# EAGLE board board (EAGLE 9.7.0)
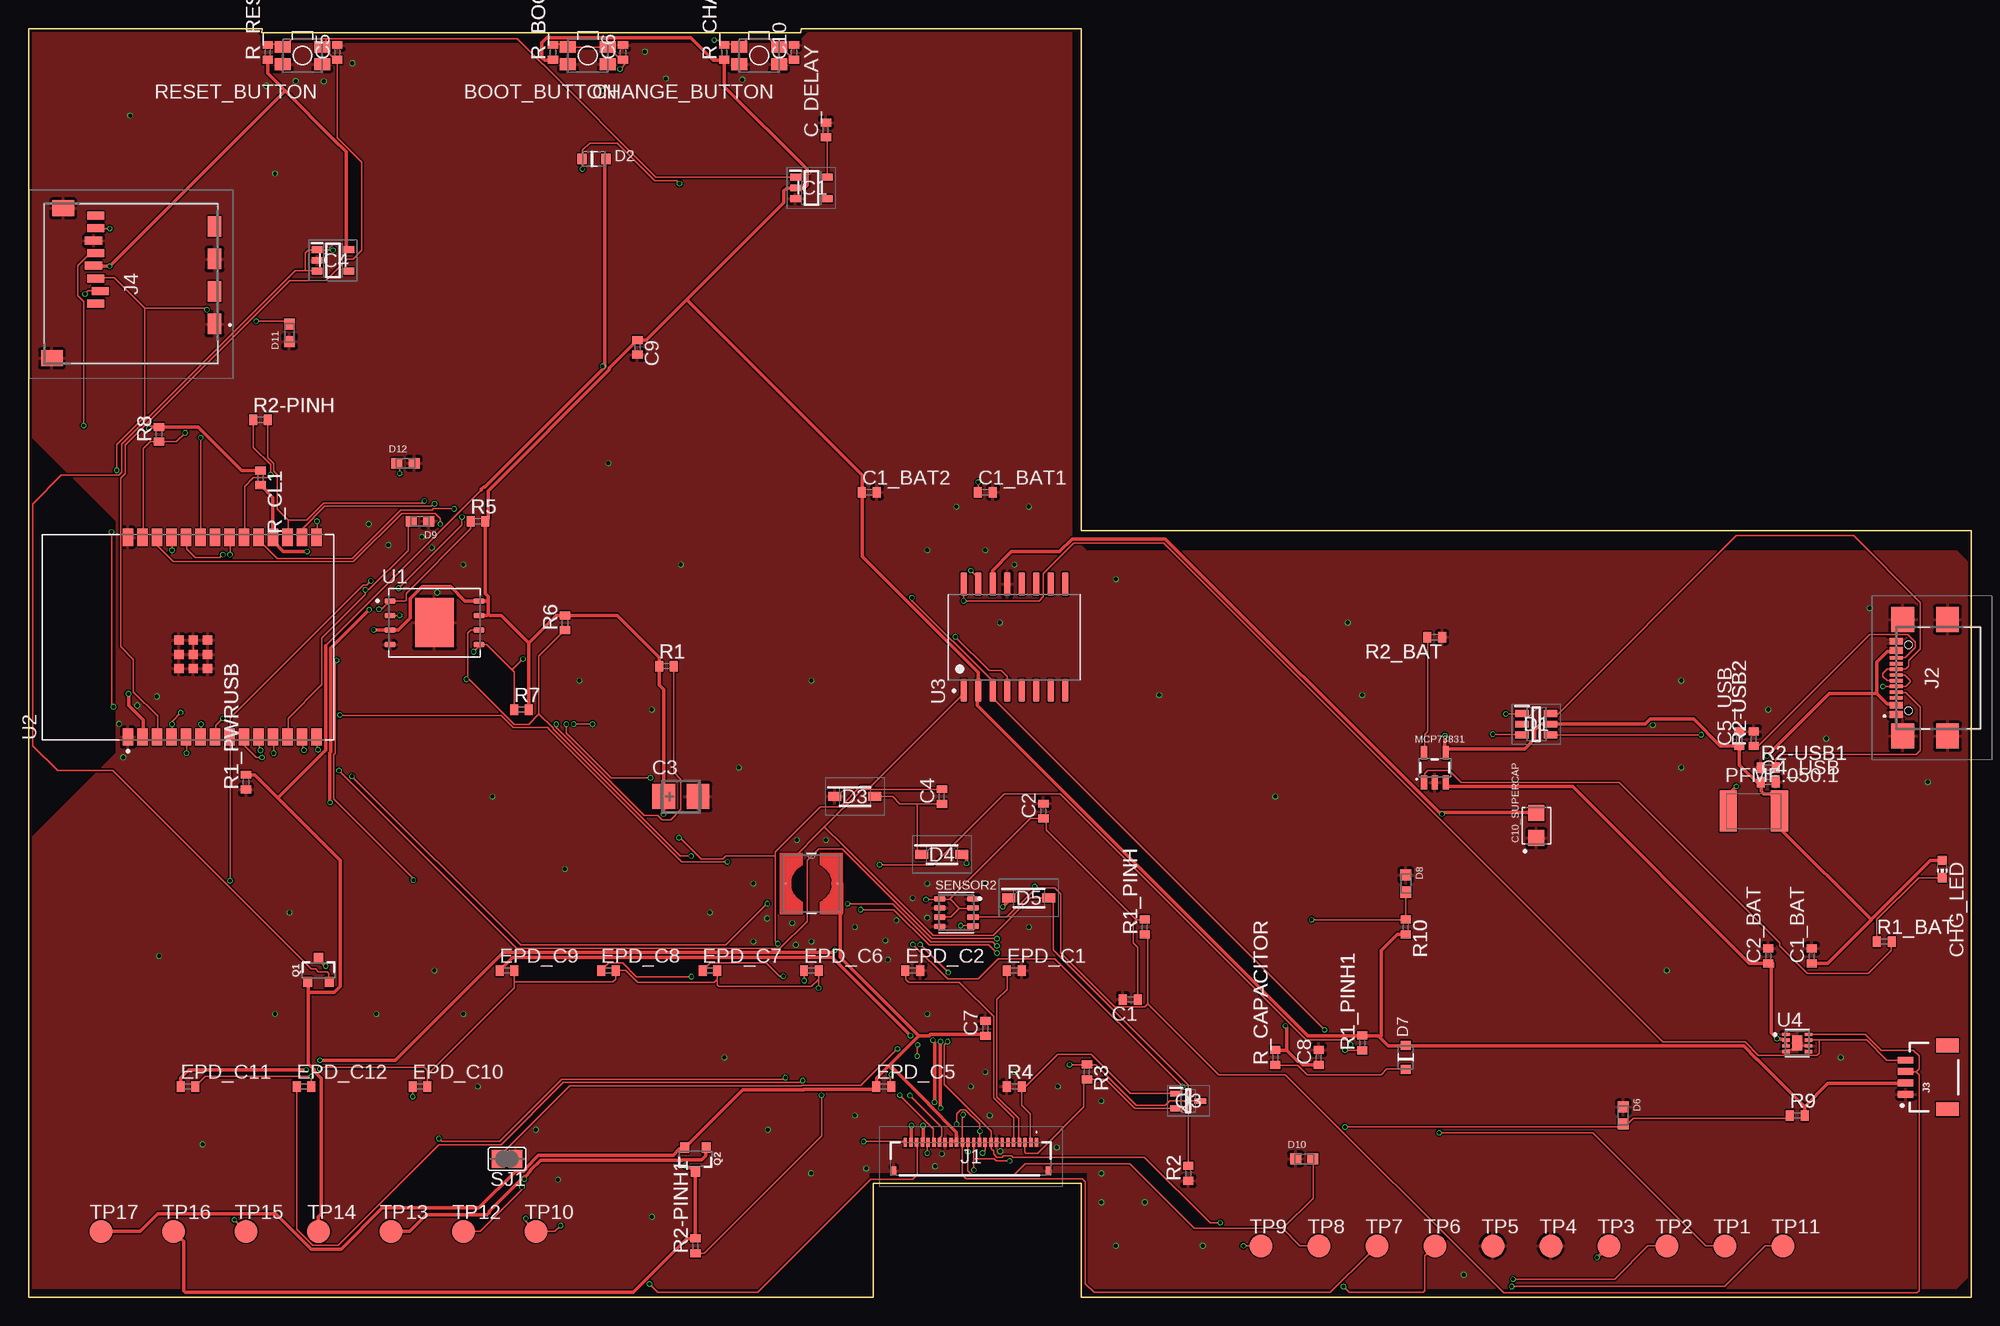
[diagram p0: board, top side]
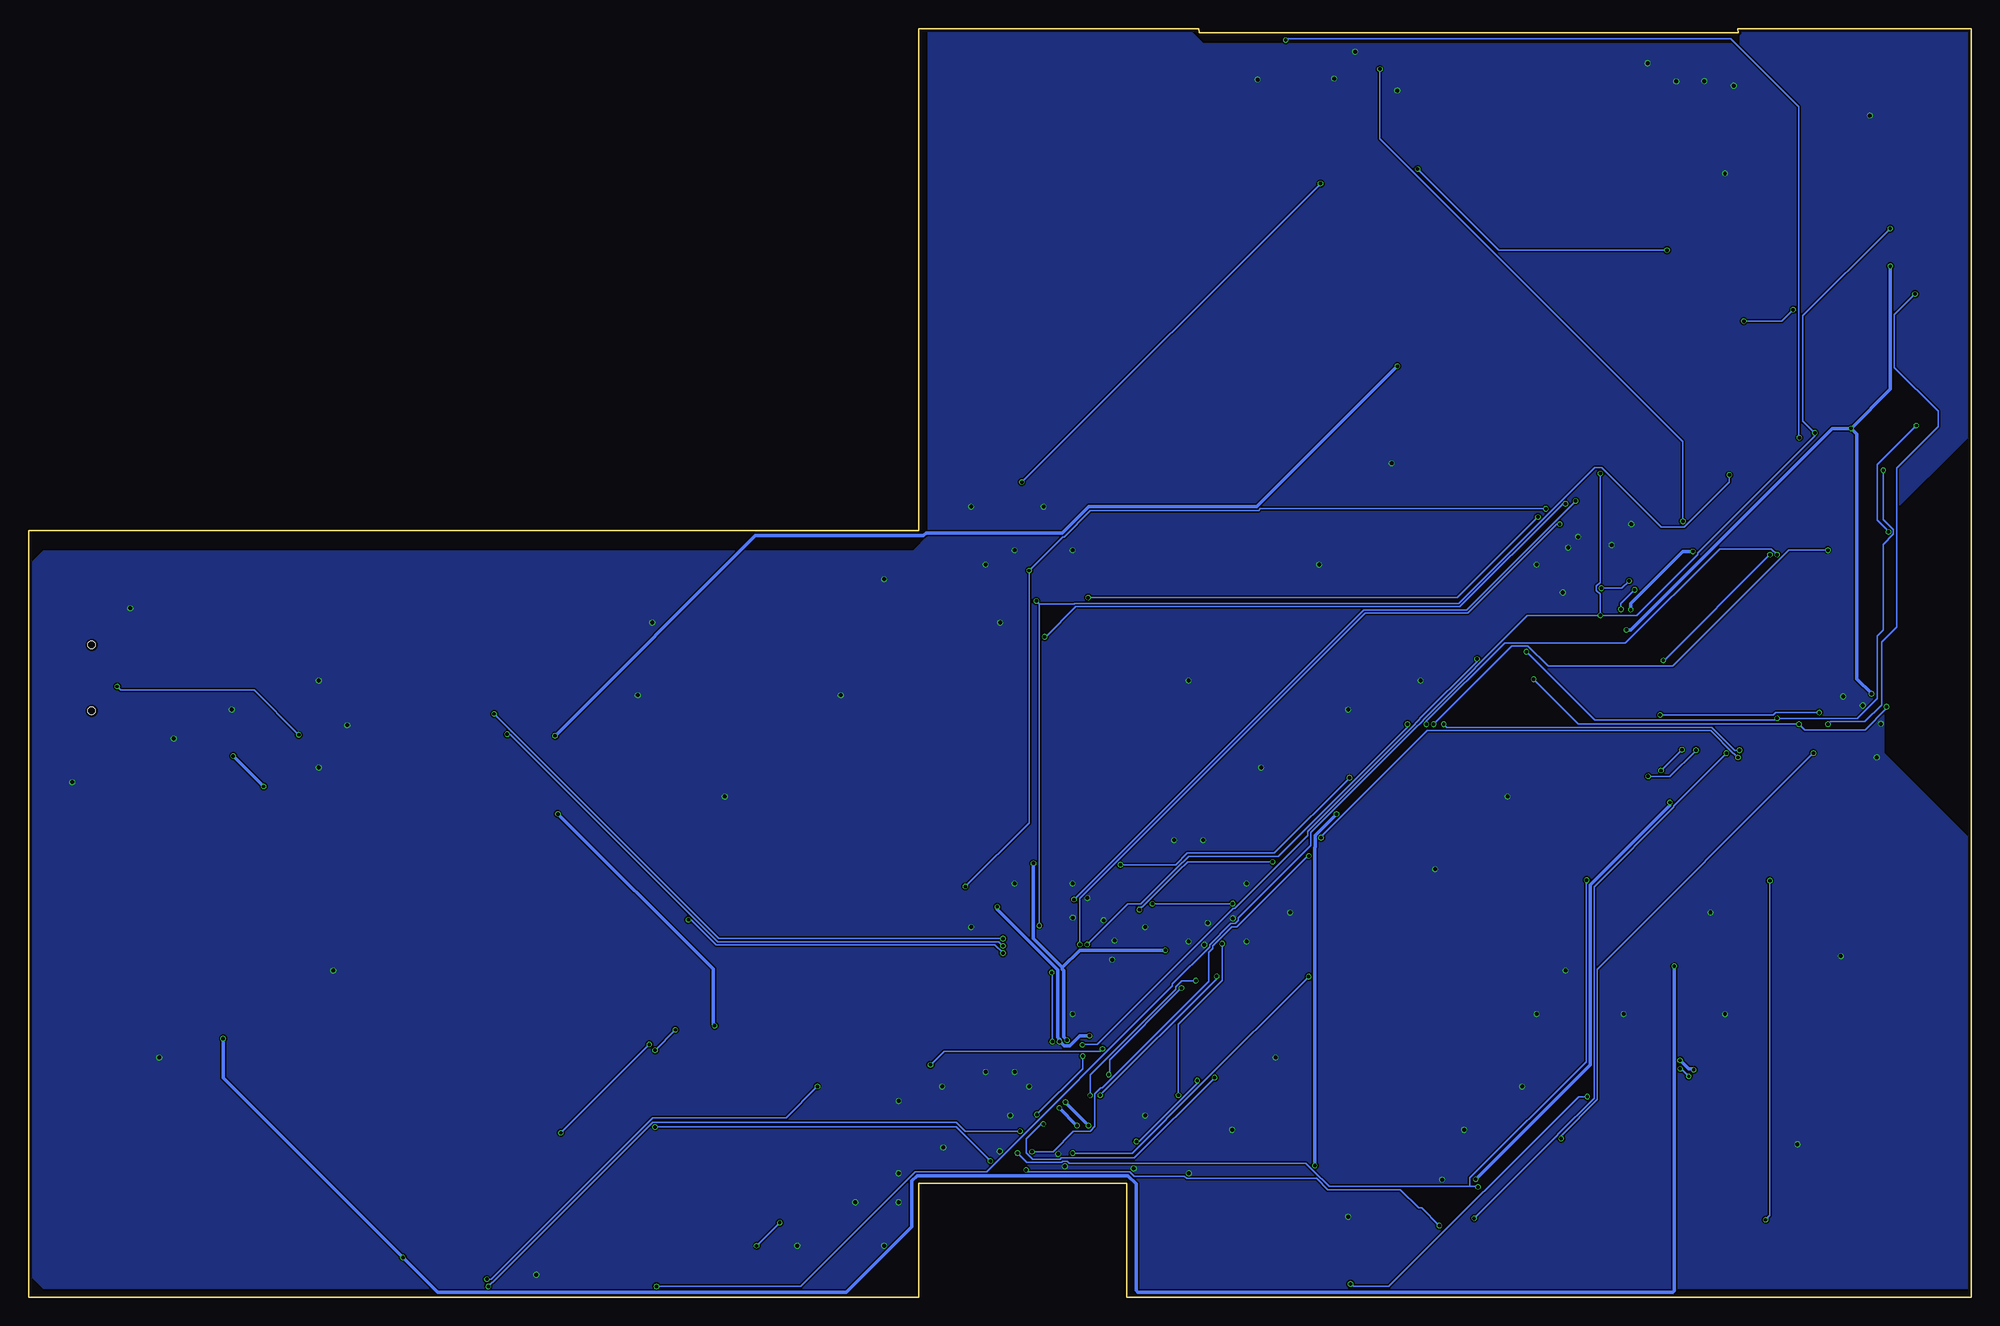
[diagram p1: board, bottom side, seen from below]

Size 170.2 x 111.2 mm. Coordinates in mm from the lower left corner, seen from the top.
Outline: 0,111.2 0,0 74,0 74,10 92.2,10 92.2,0 170.2,0 170.2,67.2 92.2,67.2 92.2,111.2 67.69,111.2 67.66,110.83 20.43,110.83 20.46,111.2 0,111.2
Copper layers (1*16): Top 0.035mm / dielectric 1.6mm / Bottom 0.035mm
Design rules "jlcpcb-2layers *": minimum track width 5mil, minimum drill 0.3mm, track to track 5mil, track to pad 5mil, pad to pad 5mil, via to via 5mil, smd to smd 5mil, copper to edge 0.2mm, drill to drill 6mil, minimum pad ring 10mil, minimum via ring 3mil, stop-mask expansion 4mil, vias tented up to drill 0mil, thermal gap 10mil

## Footprints (pad centres in the part's own frame; a part is rotated, then mirrored left to right if it is on the bottom)
MYBUTTON = smd 1.4 x 1.05: 1 1.75,0.75; 2 -1.75,0.75; 3 -1.75,-0.75; 4 1.75,-0.75
ESP32_WROVER_EAGLE-LTSPICE_C0402 = smd 0.7 x 0.9: 1 -0.65,0; 2 0.65,0
RCL_CT3528 = smd 2 x 2.2: + -1.5,0; - 1.5,0
EAGLE-LTSPICE_C0402 = smd 0.7 x 0.9: 1 -0.65,0; 2 0.65,0
CAPCP3225X100N = smd 1.4 x 1.4: 1 -1.1,0; 2 1.1,0
ADAFRUIT_CHIP-LED0603 = smd 0.8 x 0.8: A 0,-0.75; C 0,0.75
SOT95P280X145-6N = smd 1.2 x 0.6: 1 -1.25,0.95; 2 -1.25,0; 3 -1.25,-0.95; 4 1.25,-0.95; 5 1.25,0; 6 1.25,0.95
ESP32_WROVER_AVX---SD0805S020S1R0_AVX_SD0805S020S1R0_0 = smd 0.8 x 0.9: 1 -1.05,0; 2 1.05,0
SOD3716X135N = smd 1.15 x 0.8: 1 -1.75,0; 2 1.75,0
DIOC1608X36N = smd 0.97 x 0.94: 1 -0.75,0; 2 0.75,0
SOT95P280X125-5N = smd 0.9 x 0.6: 1 -1.4,0.95; 2 -1.4,0; 3 -1.4,-0.95; 4 1.4,-0.95; 5 1.4,0.95
SOT95P280X120-5N = smd 0.9 x 0.6: 1 -1.4,0.95; 2 -1.4,0; 3 -1.4,-0.95; 4 1.4,-0.95; 5 1.4,0.95
FH34SRJ24S05SH99 = smd 0.3 x 0.8: 1 5.75,1.45; 2 5.25,1.45; 3 4.75,1.45; 4 4.25,1.45; 5 3.75,1.45; 6 3.25,1.45; 7 2.75,1.45; 8 2.25,1.45; 9 1.75,1.45; 10 1.25,1.45; 11 0.75,1.45; 12 0.25,1.45; 13 -0.25,1.45; 14 -0.75,1.45; 15 -1.25,1.45; 16 -1.75,1.45; 17 -2.25,1.45; 18 -2.75,1.45; 19 -3.25,1.45; 20 -3.75,1.45; 21 -4.25,1.45; 22 -4.75,1.45; 23 -5.25,1.45; 24 -5.75,1.45 | smd 0.4 x 0.8: MP1 6.75,-1.05; MP2 -6.75,-1.05
SAMACSYS_PARTS_USB4110GFA = smd 0.3 x 1.15: A1 -3.35,3.678; A4 -2.55,3.678; A5 -1.25,3.678; A6 -0.25,3.678; A7 0.25,3.678; A8 1.25,3.678; A9 2.55,3.678; A12 3.35,3.678; B1 3.05,3.678; B4 2.25,3.678; B5 1.75,3.678; B6 0.75,3.678; B7 -0.75,3.678; B8 -1.75,3.678; B9 -2.25,3.678; B12 -3.05,3.678 | smd 2.18 x 2: MP1 -5.11,-0.827; MP2 5.11,-0.827; MP3 -5.11,3.103; MP4 5.11,3.103 | hole 0.65: -2.89,2.603; 2.89,2.603
JST04_1MM_RA = smd 0.6 x 1.35: 1 -1.5,0; 2 -0.5,0; 3 0.5,0; 4 1.5,0 | smd 1.2 x 2: NC1 2.8,-3.675; NC2 -2.8,-3.675
112ATAARR03ATTEND = smd 1.8 x 1.2: G1 10.6,10.4; G2 4.9,10.4; S1 7.75,10.4; S2 2.05,10.4 | smd 1.4 x 1.9: G3 13.6,-3.85; G4 0.45,-2.85 | smd 0.7 x 1.5: P1 8.8,0; P2 7.7,0.4; P3 6.6,0; P4 5.5,-0.2; P5 4.4,0; P6 3.3,-0.2; P7 2.2,0; P8 1.1,0
IND_4828-WE-TPC_WRE = smd 0.127 x 0.127: 1 -2.286,0; 2 2.286,0
ESP32_WROVER_SPARKFUN-IC-POWER_SOT23-5 = smd 0.55 x 1.2: 1 -0.95,-1.3; 2 0,-1.3; 3 0.95,-1.3; 4 0.95,1.3; 5 -0.95,1.3
ESP32C6_VARISTOR_CT/CN1812 = smd 1.5 x 3.6: 1 -2.25,0; 2 2.25,0
ESP32_WROVER_SPARKFUN-DISCRETESEMI_SOT23-3 = smd 0.8 x 0.9: 1 -0.95,-1; 2 0.95,-1; 3 0,1.1
SOT65P210X110-3N = smd 1.05 x 0.5: 1 -1.05,0.65; 2 -1.05,-0.65; 3 1.05,0
ESP32_WROVER_EAGLE-LTSPICE_R0402 = smd 0.7 x 0.9: 1 -0.65,0; 2 0.65,0
ESP32_WROVER_BME680_PSON80P300X300X100-8N = smd 1.016 x 0.5: 1 1.458,1.2; 2 1.458,0.4; 3 1.458,-0.4; 4 1.458,-1.2; 5 -1.458,-1.22; 6 -1.458,-0.4; 7 -1.458,0.4; 8 -1.458,1.2
SJ = smd 1.168 x 1.6: 1 -0.762,0; 2 0.762,0
TP20R = smd 2 x 2: TP 0,0
SON127P600X800X80-9N = smd 0.94 x 0.44: 1 -3.895,1.905; 2 -3.895,0.635; 3 -3.895,-0.635; 4 -3.895,-1.905; 5 3.895,-1.905; 6 3.895,-0.635; 7 3.895,0.635; 8 3.895,1.905 | smd 3.4 x 4.3: 9 0,0
XCVR_ESP32-C6-WROOM-1-N8 = smd 1.5 x 0.9: 1 -8.75,5.26; 2 -8.75,3.99; 3 -8.75,2.72; 4 -8.75,1.45; 5 -8.75,0.18; 6 -8.75,-1.09; 7 -8.75,-2.36; 8 -8.75,-3.63; 9 -8.75,-4.9; 10 -8.75,-6.17; 11 -8.75,-7.44; 12 -8.75,-8.71; 13 -8.75,-9.98; 14 -8.75,-11.25; 15 8.75,-11.25; 16 8.75,-9.98; 17 8.75,-8.71; 18 8.75,-7.44; 19 8.75,-6.17; 20 8.75,-4.9; 21 8.75,-3.63; 22 8.75,-2.36; 23 8.75,-1.09; 24 8.75,0.18; 25 8.75,1.45; 26 8.75,2.72; 27 8.75,3.99; 28 8.75,5.26 | smd 0.8 x 0.8: 29_1 -2.755,0.79; 29_2 -1.505,0.79; 29_3 -0.255,0.79; 29_4 -2.755,-0.46; 29_5 -1.505,-0.46; 29_6 -0.255,-0.46; 29_7 -2.755,-1.71; 29_8 -1.505,-1.71; 29_9 -0.255,-1.71
SOIC127P1032X265-16N = smd 2.05 x 0.59: 1 -4.655,4.445; 2 -4.655,3.175; 3 -4.655,1.905; 4 -4.655,0.635; 5 -4.655,-0.635; 6 -4.655,-1.905; 7 -4.655,-3.175; 8 -4.655,-4.445; 9 4.655,-4.445; 10 4.655,-3.175; 11 4.655,-1.905; 12 4.655,-0.635; 13 4.655,0.635; 14 4.655,1.905; 15 4.655,3.175; 16 4.655,4.445
SON50P200X200X80-9N = smd 0.76 x 0.27: 1 -0.985,0.75; 2 -0.985,0.25; 3 -0.985,-0.25; 4 -0.985,-0.75; 5 0.985,-0.75; 6 0.985,-0.25; 7 0.985,0.25; 8 0.985,0.75 | smd 0.9 x 1.3: 9 0,0

## Placement (x,y rotation side)
BOOT_BUTTON  BUTTON_CUSYOMV1  [MYBUTTON]  49,108.83 180 top
C1  100nF  [ESP32_WROVER_EAGLE-LTSPICE_C0402]  96.52,26.11 180 top
C1_BAT  4.7uF  [ESP32_WROVER_EAGLE-LTSPICE_C0402]  156.21,29.92 90 top
C1_BAT1  4.7uF  [ESP32_WROVER_EAGLE-LTSPICE_C0402]  83.82,70.56 0 top
C1_BAT2  4.7uF  [ESP32_WROVER_EAGLE-LTSPICE_C0402]  73.66,70.56 0 top
C2  100nF  [ESP32_WROVER_EAGLE-LTSPICE_C0402]  88.9,42.62 90 top
C2_BAT  4.7uF  [ESP32_WROVER_EAGLE-LTSPICE_C0402]  152.4,29.92 90 top
C3  100uF TANT  [RCL_CT3528]  57.15,43.89 0 top
C4  4.7uF/25V  [EAGLE-LTSPICE_C0402]  80.01,43.89 90 top
C4_USB  100nF  [EAGLE-LTSPICE_C0402]  152.4,45.16 0 top
C5  1uF  [ESP32_WROVER_EAGLE-LTSPICE_C0402]  27.05,109.11 90 top
C5_USB  4.7uF  [EAGLE-LTSPICE_C0402]  149.86,48.97 90 top
C6  100nF  [ESP32_WROVER_EAGLE-LTSPICE_C0402]  52.07,109.11 90 top
C7  10uF  [ESP32_WROVER_EAGLE-LTSPICE_C0402]  83.82,23.57 90 top
C8  100nF  [ESP32_WROVER_EAGLE-LTSPICE_C0402]  113.03,21.03 90 top
C9  100nF  [ESP32_WROVER_EAGLE-LTSPICE_C0402]  53.34,83.26 270 top
C10  100nF  [ESP32_WROVER_EAGLE-LTSPICE_C0402]  67.05,109.11 90 top
C10_SUPERCAP  CPH3225A  [CAPCP3225X100N]  132.08,41.35 90 top
C_DELAY  100nF  [ESP32_WROVER_EAGLE-LTSPICE_C0402]  69.85,102.31 90 top
CHANGE_BUTTON  BUTTON_CUSYOMV1  [MYBUTTON]  64,108.83 180 top
CHG_LED  [ADAFRUIT_CHIP-LED0603]  167.64,37.54 180 top
D1  USBLC6-2SC6Y  [SOT95P280X145-6N]  132.08,50.24 0 top
D2  ESP32_WROVER_AVX---SD0805S020S1R0_AVX_SD0805S020S1R0_0_0AVX_SD0805S020S1R0_0_0  [ESP32_WROVER_AVX---SD0805S020S1R0_AVX_SD0805S020S1R0_0]  49.53,99.77 0 top
D3  MBR0530  [SOD3716X135N]  72.39,43.89 0 top
D4  MBR0530  [SOD3716X135N]  80.01,38.81 0 top
D5  MBR0530  [SOD3716X135N]  87.63,35 0 top
D6  PGB1010603MR  [DIOC1608X36N]  139.7,15.95 270 top
D7  ESP32_WROVER_AVX---SD0805S020S1R0_AVX_SD0805S020S1R0_0_0AVX_SD0805S020S1R0_0_0  [ESP32_WROVER_AVX---SD0805S020S1R0_AVX_SD0805S020S1R0_0]  120.65,21.03 90 top
D8  PGB1010603MR  [DIOC1608X36N]  120.65,36.27 270 top
D9  PGB1010603MR  [DIOC1608X36N]  34.29,68.02 180 top
D10  PGB1010603MR  [DIOC1608X36N]  111.76,12.14 0 top
D11  PGB1010603MR  [DIOC1608X36N]  22.86,84.53 90 top
D12  PGB1010603MR  [DIOC1608X36N]  33.02,73.1 0 top
EPD_C1  1uF/50V  [ESP32_WROVER_EAGLE-LTSPICE_C0402]  86.36,28.65 0 top
EPD_C2  1uF/50V  [ESP32_WROVER_EAGLE-LTSPICE_C0402]  77.47,28.65 0 top
EPD_C5  0.1uF/50V  [ESP32_WROVER_EAGLE-LTSPICE_C0402]  74.93,18.49 0 top
EPD_C6  1uF/50V  [ESP32_WROVER_EAGLE-LTSPICE_C0402]  68.58,28.65 0 top
EPD_C7  1uF/50V  [ESP32_WROVER_EAGLE-LTSPICE_C0402]  59.69,28.65 0 top
EPD_C8  1uF/50V  [ESP32_WROVER_EAGLE-LTSPICE_C0402]  50.8,28.65 0 top
EPD_C9  1uF/50V  [ESP32_WROVER_EAGLE-LTSPICE_C0402]  41.91,28.65 0 top
EPD_C10  1uF/50V  [ESP32_WROVER_EAGLE-LTSPICE_C0402]  34.29,18.49 0 top
EPD_C11  1uF/50V  [ESP32_WROVER_EAGLE-LTSPICE_C0402]  13.97,18.49 0 top
EPD_C12  1uF/50V  [ESP32_WROVER_EAGLE-LTSPICE_C0402]  24.13,18.49 0 top
IC1  BD5229G-TR  [SOT95P280X125-5N]  68.58,97.23 0 top
IC4  XC6220A331MR-G  [SOT95P280X120-5N]  26.67,90.88 0 top
J1  FH34SRJ-24S-0.5SH_99_  [FH34SRJ24S05SH99]  82.55,12.14 0 top
J2  SAMACSYS_PARTS_USB4110-GF-A  [SAMACSYS_PARTS_USB4110GFA]  167.28,54.3 90 top
J3  QWIIC_RIGHT_ANGLE  [JST04_1MM_RA]  164.43,19.3 90 top
J4  112A-TAAR-R03_ATTEND  [112ATAARR03ATTEND]  5.89,95.9 270 top
L1  68uH  [IND_4828-WE-TPC_WRE]  68.58,36.27 0 top
MCP73831  ESP32_WROVER_SPARKFUN-IC-POWER_MCP73831  [ESP32_WROVER_SPARKFUN-IC-POWER_SOT23-5]  123.19,46.43 0 top
PFMF.050.1  ESP32C6_VARISTORCN1812  [ESP32C6_VARISTOR_CT/CN1812]  151.13,42.62 0 top
Q1  20V/4.2A/52mΩ/1.4W  [ESP32_WROVER_SPARKFUN-DISCRETESEMI_SOT23-3]  25.4,28.65 0 top
Q2  20V/4.2A/52mΩ/1.4W  [ESP32_WROVER_SPARKFUN-DISCRETESEMI_SOT23-3]  58.42,12.14 180 top
Q3  SI1308EDL-T1-GE3  [SOT65P210X110-3N]  101.6,17.22 0 top
R1  10K  [ESP32_WROVER_EAGLE-LTSPICE_R0402]  55.88,55.32 0 top
R1_BAT  200  [ESP32_WROVER_EAGLE-LTSPICE_R0402]  162.56,31.19 0 top
R1_PINH  10K  [ESP32_WROVER_EAGLE-LTSPICE_R0402]  97.79,32.46 90 top
R1_PINH1  10K  [ESP32_WROVER_EAGLE-LTSPICE_R0402]  116.84,22.3 90 top
R1_PWRUSB  100K  [ESP32_WROVER_EAGLE-LTSPICE_R0402]  19.05,45.16 90 top
R2  2.2  [ESP32_WROVER_EAGLE-LTSPICE_R0402]  101.6,10.87 90 top
R2-PINH  10K  [ESP32_WROVER_EAGLE-LTSPICE_R0402]  20.32,76.91 0 top
R2-PINH1  10K  [ESP32_WROVER_EAGLE-LTSPICE_R0402]  58.42,4.52 90 top
R2-USB1  5k1  [ESP32_WROVER_EAGLE-LTSPICE_R0402]  152.4,46.43 0 top
R2-USB2  5k1  [ESP32_WROVER_EAGLE-LTSPICE_R0402]  151.13,48.97 90 top
R2_BAT  2K  [ESP32_WROVER_EAGLE-LTSPICE_R0402]  123.19,57.86 180 top
R3  0.47  [ESP32_WROVER_EAGLE-LTSPICE_R0402]  92.71,19.76 270 top
R4  10K  [ESP32_WROVER_EAGLE-LTSPICE_R0402]  86.36,18.49 0 top
R5  10K  [ESP32_WROVER_EAGLE-LTSPICE_R0402]  39.37,68.02 0 top
R6  10K  [ESP32_WROVER_EAGLE-LTSPICE_R0402]  46.99,59.13 90 top
R7  10K  [ESP32_WROVER_EAGLE-LTSPICE_R0402]  43.18,51.51 0 top
R8  10K  [ESP32_WROVER_EAGLE-LTSPICE_R0402]  11.43,75.64 90 top
R9  10K  [ESP32_WROVER_EAGLE-LTSPICE_R0402]  154.94,15.95 0 top
R10  10K  [ESP32_WROVER_EAGLE-LTSPICE_R0402]  120.65,32.46 270 top
R_BOOT  10K  [ESP32_WROVER_EAGLE-LTSPICE_R0402]  45.95,109.11 90 top
R_CAPACITOR  15  [ESP32_WROVER_EAGLE-LTSPICE_R0402]  109.22,21.03 90 top
R_CHANGE  10K  [ESP32_WROVER_EAGLE-LTSPICE_R0402]  60.95,109.11 90 top
R_CL1  10K  [ESP32_WROVER_EAGLE-LTSPICE_R0402]  20.32,71.83 270 top
R_RESET  10K  [ESP32_WROVER_EAGLE-LTSPICE_R0402]  20.95,109.11 90 top
RESET_BUTTON  BUTTON_CUSYOMV1  [MYBUTTON]  24,108.83 180 top
SENSOR2  BME688  [ESP32_WROVER_BME680_PSON80P300X300X100-8N]  81.28,33.73 0 top
SJ1  [SJ]  41.91,12.14 180 top
TP1  TPTP20R  [TP20R]  148.59,4.52 0 top
TP2  TPTP20R  [TP20R]  143.51,4.52 0 top
TP3  TPTP20R  [TP20R]  138.43,4.52 0 top
TP4  TPTP20R  [TP20R]  133.35,4.52 0 top
TP5  TPTP20R  [TP20R]  128.27,4.52 0 top
TP6  TPTP20R  [TP20R]  123.19,4.52 0 top
TP7  TPTP20R  [TP20R]  118.11,4.52 0 top
TP8  TPTP20R  [TP20R]  113.03,4.52 0 top
TP9  TPTP20R  [TP20R]  107.95,4.52 0 top
TP10  TPTP20R  [TP20R]  44.45,5.79 0 top
TP11  TPTP20R  [TP20R]  153.67,4.52 0 top
TP12  TPTP20R  [TP20R]  38.1,5.79 0 top
TP13  TPTP20R  [TP20R]  31.75,5.79 0 top
TP14  TPTP20R  [TP20R]  25.4,5.79 0 top
TP15  TPTP20R  [TP20R]  19.05,5.79 0 top
TP16  TPTP20R  [TP20R]  12.7,5.79 0 top
TP17  TPTP20R  [TP20R]  6.35,5.79 0 top
U1  W25Q512JVEIQ  [SON127P600X800X80-9N]  35.56,59.13 0 top
U2  ESP32-C6-WROOM-1-N8  [XCVR_ESP32-C6-WROOM-1-N8]  13.97,57.86 90 top
U3  DS3231SN#  [SOIC127P1032X265-16N]  86.36,57.86 90 top
U4  MAX17048G+T10  [SON50P200X200X80-9N]  154.94,22.3 0 top

## Library data of the parts
BOOT_BUTTON CHANGE_BUTTON CHG_LED PFMF.050.1 RESET_BUTTON SJ1 TP1-TP17 = DeskAssistant v19 v1
C1 C1_BAT C1_BAT1 C1_BAT2 C2 C2_BAT C4 C4_USB C5 C5_USB C6-C10 C_DELAY EPD_C1 EPD_C2 EPD_C5-EPD_C12 = DeskAssistant v19 v1; SPICEMODEL: NONE; SPICEPREFIX: C
C3 = DeskAssistant v19 v1; SPICEPREFIX: C
C10_SUPERCAP = DeskAssistant v19 v1; AVAILABILITY: Not in stock; CHECK_PRICES: https://www.snapeda.com/parts/CPH3225A/Seiko+Instruments/view-part/?ref=eda; DESCRIPTION: 11 mF (EDLC) Supercapacitor 3.3 V 1210 (3225 Metric) - -; MF: Seiko Instruments; MP: CPH3225A; PACKAGE: 1210 Seiko; PRICE: None; PURCHASE-URL: https://www.snapeda.com/api/url_track_click_mouser/?unipart_id=562593&manufacturer=Seiko Instruments&part_name=CPH3225A&search_term=None; SNAPEDA_LINK: https://www.snapeda.com/parts/CPH3225A/Seiko+Instruments/view-part/?ref=snap
D1 = DeskAssistant v19 v1; AVAILABILITY: In Stock; CHECK_PRICES: https://www.snapeda.com/parts/USBLC6-2SC6Y/STMicroelectronics/view-part/?ref=eda; DESCRIPTION: 17V Clamp 5A (8/20µs) Ipp Tvs Diode Surface Mount SOT-23-6; MF: STMicroelectronics; MP: USBLC6-2SC6Y; PACKAGE: SOT-23-6 STMicroelectronics; PRICE: None; SNAPEDA_LINK: https://www.snapeda.com/parts/USBLC6-2SC6Y/STMicroelectronics/view-part/?ref=snap
D2 D7 = DeskAssistant v19 v1; CENTROID_NOT_SPECIFIED: No; DATASHEET: http://datasheets.avx.com/schottky.pdf; DIGIKEY_DESCRIPTION: DIODE SCHOTTKY 20V 1A 0805; DIGIKEY_PART_NUMBER: 478-7800-1-ND; LEAD_FREE: yes; MF: AVX; MOUSER_PART_NUMBER: 581-SD0805S020S1R0; PACKAGE: 0805 (2012 metric); PREFIX: D; ROHS: yes; TEMPERATURE_RANGE_HIGH: +125°C; TEMPERATURE_RANGE_LOW: -55°C
D3-D5 = DeskAssistant v19 v1; AVAILABILITY: In Stock; CHECK_PRICES: https://www.snapeda.com/parts/MBR0530/Onsemi/view-part/?ref=eda; DESCRIPTION: Diode Schottky 30 V 500mA Surface Mount SOD-123; MF: ON Semiconductor; MP: MBR0530; PACKAGE: SOD-123-2 ON Semiconductor; PRICE: None; PURCHASE-URL: https://www.snapeda.com/api/url_track_click_mouser/?unipart_id=179458&manufacturer=ON Semiconductor&part_name=MBR0530&search_term=None; SNAPEDA_LINK: https://www.snapeda.com/parts/MBR0530/Onsemi/view-part/?ref=snap
D6 D8-D12 = DeskAssistant v19 v1; AVAILABILITY: In Stock; CHECK_PRICES: https://www.snapeda.com/parts/PGB1010603MR/Littelfuse/view-part/?ref=eda; DESCRIPTION: 150V (Typ) Clamp - Ipp Tvs Diode Surface Mount 0603 (1608 Metric); MF: Littelfuse Inc.; MP: PGB1010603MR; PACKAGE: 0603 Littelfuse Inc.; PRICE: None; PURCHASE-URL: https://www.snapeda.com/api/url_track_click_mouser/?unipart_id=5659453&manufacturer=Littelfuse Inc.&part_name=PGB1010603MR&search_term=None; SNAPEDA_LINK: https://www.snapeda.com/parts/PGB1010603MR/Littelfuse/view-part/?ref=snap
IC1 = DeskAssistant v19 v1; DESCRIPTION: Voltage Detector with Adjustable Delay Time: CMOS processes are utilized to develop high precision, low current consumption CMOS reset ICs that allow arbitrary setting of the delay time. The extensive lineup includes both Nch Open Drain and CMOS output types in a wide range of detection voltages (from 2.3V to 6.0V, in 0.1V steps), enabling selection of the ideal solution based on customer requirements. In addition, the entire series is of course both lead-free and RoHS-compliant.; HEIGHT: 1.25mm; MANUFACTURER_NAME: ROHM Semiconductor; MANUFACTURER_PART_NUMBER: BD5229G-TR; MOUSER_PART_NUMBER: 755-BD5229G-TR; MOUSER_PRICE-STOCK: https://www.mouser.co.uk/ProductDetail/ROHM-Semiconductor/BD5229G-TR?qs=4kLU8WoGk0vvnhrrYwdszw%3D%3D
IC4 = DeskAssistant v19 v1; DESCRIPTION: LDO Voltage Regulators; HEIGHT: 1.2mm; MANUFACTURER_NAME: Torex; MANUFACTURER_PART_NUMBER: XC6220A331MR-G; MOUSER_PART_NUMBER: 865-XC6220A331MR-G; MOUSER_PRICE-STOCK: https://www.mouser.co.uk/ProductDetail/Torex-Semiconductor/XC6220A331MR-G?qs=AsjdqWjXhJ8ZSWznL1J0gg%3D%3D
J1 = DeskAssistant v19 v1; DESCRIPTION: 24 Position FFC, FPC Connector Contacts, Top and Bottom 0.020" (0.50mm) Surface Mount, Right Angle; HEIGHT: 1.1mm; MANUFACTURER_NAME: Hirose; MANUFACTURER_PART_NUMBER: FH34SRJ-24S-0.5SH(99); MOUSER_PART_NUMBER: 798-FH34SRJ24S05SH99; MOUSER_PRICE-STOCK: https://www.mouser.co.uk/ProductDetail/Hirose-Connector/FH34SRJ-24S-0.5SH99?qs=vcbW%252B4%252BSTIpKBl5ap9J8Fw%3D%3D
J2 = DeskAssistant v19 v1; DESCRIPTION: CONN USB 2.0 TYPE-C R/A SMT; HEIGHT: 3.26mm; MANUFACTURER_NAME: GCT (GLOBAL CONNECTOR TECHNOLOGY); MANUFACTURER_PART_NUMBER: USB4110-GF-A; MOUSER_PART_NUMBER: 640-USB4110-GF-A; MOUSER_PRICE-STOCK: https://www.mouser.co.uk/ProductDetail/GCT/USB4110-GF-A?qs=KUoIvG%2F9IlYiZvIXQjyJeA%3D%3D
J3 = DeskAssistant v19 v1; PROD_ID: CONN-13694
J4 = DeskAssistant v19 v1; DESCRIPTION: Micro SD Card Socket, Push-Push Type, Top Mount, SMT, H=1.83mm, 10u; HEIGHT: 1.9mm; MANUFACTURER_NAME: ATTEND; MANUFACTURER_PART_NUMBER: 112A-TAAR-R03 ATTEND
L1 = DeskAssistant v19 v1; COPYRIGHT: Copyright (C) 2024 Ultra Librarian. All rights reserved.; MANUFACTURER_PART_NUMBER: 744043680; MFR_NAME: Wurth Electronics
MCP73831 = DeskAssistant v19 v1; PROD_ID: IC-09995
Q1 Q2 = DeskAssistant v19 v1; PROD_ID: TRAN-14388
Q3 = DeskAssistant v19 v1; AVAILABILITY: In Stock; CHECK_PRICES: https://www.snapeda.com/parts/SI1308EDL-T1-GE3/Vishay+Siliconix/view-part/?ref=eda; DESCRIPTION: Si1308EDL-T1-GE3 N-channel MOSFET Transistor, 1.5 A, 30 V, 3-Pin SC-70 | Siliconix / Vishay SI1308EDL-T1-GE3; MF: Vishay Siliconix; MP: SI1308EDL-T1-GE3; PACKAGE: SOT-323 Vishay Semiconductor; PRICE: None; PURCHASE-URL: https://www.snapeda.com/api/url_track_click_mouser/?unipart_id=274603&manufacturer=Vishay Siliconix&part_name=SI1308EDL-T1-GE3&search_term=None; SNAPEDA_LINK: https://www.snapeda.com/parts/SI1308EDL-T1-GE3/Vishay+Siliconix/view-part/?ref=snap
R1 R1_BAT R1_PINH R1_PINH1 R1_PWRUSB R2 R2-PINH R2-PINH1 R2-USB1 R2-USB2 R2_BAT R3-R10 R_BOOT R_CAPACITOR R_CHANGE R_CL1 R_RESET = DeskAssistant v19 v1; SPICEMODEL: NONE; SPICEPREFIX: R
SENSOR2 = DeskAssistant v19 v1; AVAILABILITY: Unavailable; DESCRIPTION: Integrated Environmental Unit; MF: Bosch Sensortec; MP: BME680; PACKAGE: LGA-8 Bosch Tools; PRICE: None
U1 = DeskAssistant v19 v1; AVAILABILITY: In Stock; CHECK_PRICES: https://www.snapeda.com/parts/W25Q512JVEIQ/Winbond+Electronics/view-part/?ref=eda; DESCRIPTION: FLASH - NOR Memory IC 512Mb (64M x 8) SPI - Quad I/O 133 MHz 8-WSON (8x6); MF: Winbond Electronics; MP: W25Q512JVEIQ; PACKAGE: Package; PRICE: None; SNAPEDA_LINK: https://www.snapeda.com/parts/W25Q512JVEIQ/Winbond+Electronics/view-part/?ref=snap
U2 = DeskAssistant v19 v1; AVAILABILITY: In Stock; CHECK_PRICES: https://www.snapeda.com/parts/ESP32-C6-WROOM-1-N8/Espressif+Systems/view-part/?ref=eda; DESCRIPTION: Multiprotocol Modules ESP32-C6 module, Wi-Fi 6 in 2.4 GHz band, Bluetooth 5, Zigbee 3.0 and Thread. ESP34-WROOM Compatible - ENGINEERING SAMPLE; MF: Espressif Systems; MP: ESP32-C6-WROOM-1-N8; PACKAGE: None; PRICE: None; SNAPEDA_LINK: https://www.snapeda.com/parts/ESP32-C6-WROOM-1-N8/Espressif+Systems/view-part/?ref=snap
U3 = DeskAssistant v19 v1; AVAILABILITY: In Stock; CHECK_PRICES: https://www.snapeda.com/parts/DS3231SN%23/Analog+Devices/view-part/?ref=eda; DESCRIPTION: Extremely Accurate I²C-Integrated RTC/TCXO/Crystal; MF: Analog Devices; MP: DS3231SN#; PACKAGE: SOIC-16 Maxim; PRICE: None; PURCHASE-URL: https://www.snapeda.com/api/url_track_click_mouser/?unipart_id=99048&manufacturer=Analog Devices&part_name=DS3231SN#&search_term=None; SNAPEDA_LINK: https://www.snapeda.com/parts/DS3231SN%23/Analog+Devices/view-part/?ref=snap
U4 = DeskAssistant v19 v1; AVAILABILITY: In Stock; CHECK_PRICES: https://www.snapeda.com/parts/MAX17048G+T10/Analog+Devices/view-part/?ref=eda; DESCRIPTION: 3µA 1-Cell/2-Cell Fuel Gauge with ModelGauge; MF: Analog Devices; MP: MAX17048G+T10; PACKAGE: TDFN-8 Maxim; PRICE: None; PURCHASE-URL: https://www.snapeda.com/api/url_track_click_mouser/?unipart_id=329239&manufacturer=Analog Devices&part_name=MAX17048G+T10&search_term=None; SNAPEDA_LINK: https://www.snapeda.com/parts/MAX17048G+T10/Analog+Devices/view-part/?ref=snap

## Nets
3V3: C1_BAT2.1 C3.+ C9.1 D7.2 IC1.2 IC4.5 J3.2 J4.P4 Q2.3 R1.1 R1_PINH1.2 R2-PINH1.2 R5.2 R6.2 R7.2 R8.2 R9.2 R10.2 R_BOOT.1 R_CHANGE.1 R_CL1.1 R_RESET.1 TP16.TP U1.3 U1.7 U1.8 U2.2 U3.2
32KHZ: R2-PINH1.1 U2.9 U3.1
DN: D1.4 J2.A7 J2.B7
DP: D1.6 J2.A6 J2.B6
EPD_3V3: C7.1 EPD_C5.1 J1.15 J1.16 L1.2 Q2.2 TP17.TP
EPD_3V3_C: Q2.1 R_CL1.2 TP13.TP U2.18
EPD_BUSY: J1.9 TP9.TP U2.26
EPD_CS: D6.2 J1.12 R9.1 TP10.TP U2.11
EPD_DC: J1.11 TP11.TP U2.5
EPD_RST: J1.10 TP12.TP U2.21
FLASH_CS: D9.2 R5.1 U1.1 U2.12
GDR: J1.2 Q3.1 R4.2
GND: BOOT_BUTTON.1 BOOT_BUTTON.2 C1.2 C1_BAT1.2 C1_BAT2.2 C1_BAT.2 C2.2 C2_BAT.2 C3.- C4_USB.2 C5.2 C5_USB.2 C6.2 C7.2 C8.2 C9.2 C10.2 C10_SUPERCAP.1 C_DELAY.2 CHANGE_BUTTON.1 CHANGE_BUTTON.2 D3.1 D6.1 D8.1 D9.1 D10.1 D11.1 D12.2 EPD_C1.2 EPD_C2.2 IC1.3 IC4.2 J1.8 J1.17 J1.MP1 J1.MP2 J2.A1 J2.A12 J2.B1 J2.B12 J2.MP1 J2.MP2 J2.MP3 J2.MP4 J3.1 J4.G1 J4.G2 J4.G3 J4.G4 J4.P6 MCP73831.2 R1_PWRUSB.1 R2-USB1.1 R2-USB2.2 R2.1 R2_BAT.1 R4.1 RESET_BUTTON.1 RESET_BUTTON.2 SENSOR2.1 SENSOR2.5 SENSOR2.7 SJ1.1 TP4.TP TP5.TP U1.4 U1.9 U2.1 U2.28 U2.29_1 U2.29_2 U2.29_3 U2.29_4 U2.29_5 U2.29_6 U2.29_7 U2.29_8 U2.29_9 U3.13 U4.1 U4.4 U4.6 U4.9
GPIO8: R1.2 U2.10
I2C_PW: C1.1 C2.1 R1_PINH.2 R2-PINH.2 SENSOR2.2 SENSOR2.6 SENSOR2.8 U2.17
INT_RTC: R1_PINH1.1 TP15.TP U2.8 U3.3
IO/BOOT: BOOT_BUTTON.3 BOOT_BUTTON.4 C6.1 R_BOOT.2 U2.15
IO/CHANGE: C10.1 CHANGE_BUTTON.3 CHANGE_BUTTON.4 R_CHANGE.2 U2.23
MISO: D12.1 J4.P7 R8.1 TP6.TP U1.2 U2.27
MOSI: D11.2 J1.14 J4.P3 R7.1 TP7.TP U1.5 U2.7
N$1: J2.A5 R2-USB1.2
N$2: J2.B5 R2-USB2.1
N$3: D1.2
N$4: C1_BAT1.1 D2.1 IC4.1 IC4.3 Q1.2
N$5: C4.1 D3.2 D4.1
N$6: MCP73831.5 R2_BAT.2
N$7: MCP73831.1 R1_BAT.2
N$8: CHG_LED.C R1_BAT.1
N$9: EPD_C12.1 J1.24
N$10: C_DELAY.1 IC1.5
N$11: EPD_C10.1 J1.22
N$12: EPD_C6.1 J1.18
N$13: EPD_C5.2 EPD_C6.2 EPD_C7.2 EPD_C8.2 EPD_C9.2 EPD_C10.2 EPD_C11.2 EPD_C12.2
N$14: EPD_C7.1 J1.19
N$15: EPD_C8.1 J1.20
N$16: D7.1 R_CAPACITOR.1
N$17: EPD_C2.1 J1.5
N$18: EPD_C1.1 J1.4
PREVGH: D5.1 EPD_C9.1 J1.21
PREVGL: D4.2 EPD_C11.1 J1.23
RESE: J1.3 Q3.2 R3.2
RESE': R2.2 R3.1 SJ1.2
RESET: C5.1 IC1.1 R_RESET.2 RESET_BUTTON.3 RESET_BUTTON.4 U2.3
RTC_RST: U2.16 U3.4
RX: TP2.TP U2.24
SCK: D10.2 J1.13 J4.P5 R6.1 TP8.TP U1.6 U2.6
SCL: J3.4 R2-PINH.1 SENSOR2.4 U2.20 U3.16 U4.7
SDA: J3.3 R1_PINH.1 SENSOR2.3 U2.19 U3.15 U4.8
SRC: C4.2 D5.2 L1.1 Q3.3
SS_SD: D8.2 J4.P2 R10.1 U2.4
TX: TP1.TP U2.25
USB_D+: D1.1 U2.14
USB_D-: D1.3 U2.13
VBAT: C2_BAT.1 MCP73831.3 Q1.3 TP3.TP U4.2 U4.3
VBUS: C1_BAT.1 C4_USB.1 C5_USB.1 CHG_LED.A D1.5 D2.2 MCP73831.4 PFMF.050.1.2 Q1.1 R1_PWRUSB.2 TP14.TP
VRTC: C8.1 C10_SUPERCAP.2 R_CAPACITOR.2 U3.14
VUSB: J2.A4 J2.A9 J2.B4 J2.B9 PFMF.050.1.1

## Tracks (layer width: path | path; a pad name or v marks a point on that pad's centre or on a via)
3V3  (via drill 0.3)
  Top 0.305: 22.48,105.74 20.95,107.26 20.95,108.28 21.08,108.41 20.95,108.53 R_RESET.1 | IC4.5 28.07,91.77 27.81,92.02 27.81,100.39 26.7,101.5 26.7,101.52 22.48,105.74 | 22.48,105.74 v7.11,90.37 5.71,90.37 J4.P4 | 11.43,76.28 14.86,76.28 18.67,72.47 20.32,72.47 R_CL1.1 | v10.54,76.15 10.67,76.28 11.43,76.28 | U2.2 10.03,49.22 10.03,50.62 8.76,51.89 8.76,52.89 v8.75,52.91 | 11.43,76.28 R8.2 | 155.57,16.71 155.57,15.95 R9.2 | 155.57,16.71 157.61,18.74 164.34,18.74 J3.2 | 118.36,22.81 119.13,22.05 120.65,22.05 | 118.36,22.81 118.24,22.94 116.84,22.94 R1_PINH1.2 | 118.36,22.81 118.49,22.94 118.49,30.43 119.89,31.83 120.65,31.83 R10.2 | 120.65,22.05 D7.2 | TP16.TP 13.33,5.79 13.33,5.16 13.59,4.9 13.59,0.58 13.72,0.46 52.96,0.46 57.66,5.16 58.42,5.16 R2-PINH1.2 Q2.3 58.42,11.38 57.69,11.38 v57.52,11.56 | 40.26,61.16 40.26,61.42 40,61.67 40,68.02 R5.2 40.28,68.28 40.28,70.69 40.27,70.69 50.89,81.31 50.89,81.44 53.34,83.9 | 40.26,61.16 40.13,61.04 U1.8 38.23,61.04 36.96,62.3 34.48,62.3 33.43,61.25 33.43,59.54 32.38,58.5 U1.3 v30.23,58.5 | U1.7 40.13,59.77 40.26,59.89 | 40.26,61.16 40.26,59.89 | 43.81,57.35 43.81,51.51 R7.2 | 43.81,57.35 46.23,59.77 46.99,59.77 | 55.24,55.32 55.24,56.08 51.56,59.77 46.99,59.77 | 46.99,59.77 R6.2 | 55.63,43.89 55.63,53.29 55.24,53.67 55.24,55.32 | 55.24,55.32 R1.1 | 40.26,59.89 40.39,59.77 41.4,59.77 43.81,57.35 | R_BOOT.1 45.85,108.41 45.21,108.41 44.96,108.66 44.96,109.96 45.38,110.39 57.99,110.39 59.97,108.41 60.83,108.41 R_CHANGE.1 60.96,108.41 60.96,106.12 68.2,98.88 68.2,97.48 67.94,97.23 IC1.2 66.42,97.23 66.17,96.98 66.17,95.96 57.66,87.45
  Top 0.305: 53.34,83.9 54.1,83.9 57.66,87.45 | 57.66,87.45 73.02,72.08 73.02,70.58 C1_BAT2.1 73.02,70.56 73.02,64.94 83.18,54.78 U3.2 83.12,53.14 83.12,51.89 112.07,22.94 R1_PINH1.2 | 53.34,83.9 C9.1 | 55.63,43.89 v55.63,42.37 | 55.63,43.89 C3.+ | R1_PINH1.2 | 120.65,22.05 143.01,22.05 143.02,22.03 150.24,22.03 151.4,20.87 151.42,20.87 155.57,16.71
  Bottom 0.305: v7.11,90.37 7.11,79.58 v10.54,76.15 | v10.54,76.15 10.03,75.64 10.03,54.19 v8.75,52.91 | v30.23,58.5 29.87,58.5 12.21,76.15 v10.54,76.15 | v57.53,11.54 v57.52,11.56 | v57.53,11.54 | v57.53,11.54 57.53,39.44 57.51,39.47 57.51,40.47 55.78,42.2 55.78,42.21 v55.63,42.37
32KHZ  (via drill 0.3)
  Top 0.152: 65.4,38.68 65.4,39.06 69.34,43 71.11,43 72.91,44.8 73.81,44.8 81.91,52.91 U3.1 | R2-PINH1.1 58.42,3.89 59.18,3.89 69.47,14.17 v69.47,17.72 | v20.45,47.32 19.94,47.32 18.92,48.34 18.92,49.1 U2.9 | 65.4,38.68 61.09,38.68 60.83,38.43 58.93,38.43 57.07,40.29 v56.97,40.29 | v65.64,31.01 65.4,31.25 65.4,38.68
  Bottom 0.152: v20.45,47.32 20.8,47.67 20.85,47.67 22.86,49.68 47.68,49.68 56.97,40.38 v56.97,40.29 | v69.47,17.72 69.47,23.95 65.64,27.78 v65.64,31.01
DN  (via drill 0.3)
  Top 0.152: J2.A7 163.7,54.56 164.34,54.56 164.85,54.05 164.85,53.92 164.46,53.54 163.7,53.54 J2.B7 163.58,53.54 v162.43,53.54 | v146.52,49.31 133.35,49.31 D1.4
  Bottom 0.152: v162.43,53.54 162.12,53.22 150.43,53.22 v146.52,49.31 | v146.52,49.31
DP
  Top 0.152: J2.A6 162.81,54.05 162.43,54.43 162.43,54.69 162.81,55.07 163.58,55.07 J2.B6 163.7,55.07 164.46,55.07 164.72,55.32 164.72,55.83 165.73,56.84 165.73,60.91 159.89,66.75 149.61,66.75 133.98,51.13 133.35,51.13 D1.6
EPD_3V3
  Top 0.305: J1.16 80.9,13.66 81.15,13.66 81.28,13.79 81.28,14.26 | 75.36,20.31 74.29,19.25 74.29,18.49 | 75.36,20.31 77.98,22.94 | 74.29,18.49 EPD_C5.1 | J1.15 81.3,14.06 81.28,14.26 | TP17.TP 9.78,5.79 11.3,7.31 21.67,7.31 24.75,4.23 27.38,4.23 31,7.86 39.46,7.86 42.66,11.06 43.37,11.06 43.54,11.22 43.54,11.33 44.67,12.46 56.46,12.46 57.02,13.03 57.4,13.03 Q2.2 57.51,13.14 62.57,18.2 67.9,18.2 67.92,18.22 74.03,18.22 74.29,18.49 | L1.2 71.25,36.27 71.25,33.73 71.12,33.6 71.12,29.79 77.98,22.94 | 81.28,14.26 81.28,14.49 78.86,16.91 78.86,16.96 75.79,20.04 75.64,20.04 75.36,20.31 | 77.98,22.94 78.89,22.94 79,23.05 83.69,23.05 C7.1
EPD_3V3_C  (via drill 0.3)
  Top 0.305: R_CL1.2 20.32,71.2 21.41,70.11 U2.18 21.46,66.5 21.46,66.23 22.32,65.38 v24.41,65.38 | TP13.TP 33.4,5.79 34.84,7.23 40.15,7.23 40.35,7.43 40.35,7.53 43.18,10.36 v43.43,10.36 43.31,10.49 43.45,10.63 43.55,10.63 43.97,11.05 43.97,11.15 44.85,12.03 57.28,12.03 57.31,12.06 58.98,12.06 59.31,12.39 59.31,13.03 Q2.1 | v26.42,43.38 26.42,43.51 26.4,43.53 26.4,47.71 26.49,47.8 26.49,56.92 v29.84,60.27
  Bottom 0.305: v29.84,60.27 29.84,60.81 25.28,65.37 v24.41,65.37 v24.41,65.38 | v26.42,43.38 26.42,43.25 26.43,43.24 26.43,43.12 33.41,36.13 33.41,20.39 v43.43,10.36
EPD_BUSY  (via drill 0.3)
  Top 0.152: v104.39,6.55 103.5,6.55 97.76,12.3 86.21,12.3 86.12,12.39 85.38,12.39 85.29,12.3 84.82,12.3 84.54,12.58 84.54,12.89 84.47,12.89 84.33,13.03 84.33,13.54 J1.9 84.33,13.66 84.33,14.58 80.21,18.69 80.21,22.12 v80.52,22.43 | TP9.TP v106.43,4.52 | v36.07,67.77 36.07,68.27 35.65,68.69 32.67,68.69 28.47,64.49 12.68,64.49 11.3,65.86 11.3,66.5 U2.26 | v80.57,28.48 80.56,28.48 v78.1,30.94
  Bottom 0.152: v106.43,4.52 v104.39,6.55 | v36.07,67.77 36.31,67.77 44.11,59.97 53.11,59.97 78.1,34.97 v78.1,30.94 | v80.52,22.43 80.52,28.44 v80.57,28.48
EPD_CS  (via drill 0.3)
  Top 0.152: 139.7,14.93 139.83,14.93 140.59,15.7 153.92,15.7 154.05,15.57 154.3,15.57 154.3,15.95 R9.1 | 139.7,14.93 D6.2 139.7,15.19 | v46.61,6.3 46.1,5.79 TP10.TP 43.81,5.79 43.81,6.43 43.56,6.68 v43.56,6.93 | J1.12 82.8,13.54 82.8,12.14 82.81,12.14 | v115.32,14.93 139.7,14.93 | 82.81,12.14 84.58,12.14 84.76,11.96 v85.94,11.96 | v21.47,47.69 v21.46,47.7 21.46,49.06 U2.11 | v82.81,11.17 v82.81,11.18 82.81,12.14
  Bottom 0.152: v46.61,6.3 48.16,7.85 48.42,7.85 50.02,9.45 56.38,9.45 57.35,10.42 68.76,10.42 68.95,10.62 73.34,10.62 73.75,11.02 82.66,11.02 v82.81,11.17 | v115.32,14.93 88.91,14.93 v85.94,11.96 | v43.56,6.93 36.22,14.27 36.22,14.29 33.05,17.46 33.05,35.99 26.07,42.97 26.07,43.09 v21.47,47.69
EPD_DC  (via drill 0.3)
  Top 0.152: 83.31,14.55 83.31,13.66 J1.11 | TP11.TP 152.15,4.52 148.59,0.96 v129.92,0.96 | v13.84,47.7 13.84,49.1 U2.5 | v35.94,13.92 36.19,13.66 41.27,13.66 46.72,19.11 66.14,19.11 v66.29,19.26 | v81.3,15.21 81.3,16.1 81.66,16.46 82.05,16.46 83.31,15.2 83.31,14.55 | v83.33,14.57 83.31,14.55
  Bottom 0.152: v81.3,15.21 81.32,15.19 81.53,15.19 82.8,13.92 82.8,12.68 82.25,12.12 79.83,12.12 79.72,12.23 79.11,12.23 79.1,12.22 73.34,12.22 v66.29,19.26 | v35.94,13.92 35.94,14.18 32.77,17.34 32.77,28.77 v13.84,47.7 | v83.33,14.57 88.16,14.57 88.95,15.36 115.51,15.36 129.55,1.32 129.57,1.32 v129.92,0.96
EPD_RST  (via drill 0.3)
  Top 0.152: v17.65,65.1 17.65,66.5 U2.21 | J1.10 83.8,12.88 v83.57,12.65 | TP12.TP 39.57,5.79 43.18,9.4 43.18,9.65 v43.22,9.69 | v33.7,36.57 33.65,36.62 33.65,36.78 26.76,43.68 26.76,47.56 26.85,47.65 26.85,55.68 v27,55.83
  Bottom 0.152: 43.94,9.73 43.94,10.49 33.77,20.67 33.77,36.28 33.7,36.34 v33.7,36.57 | v43.22,9.69 43.26,9.73 43.94,9.73 | 43.94,9.73 49.9,9.73 49.91,9.73 56.26,9.73 57.64,11.11 57.68,11.11 58.32,11.75 79.03,11.75 79.22,11.95 79.6,11.95 79.71,11.84 82.76,11.84 v83.57,12.65 | v17.65,65.1 26.92,55.83 v27,55.83
FLASH_CS  (via drill 0.3)
  Top 0.152: R5.1 38.73,68.02 38.73,67.36 33.08,61.7 33.08,61.09 33.02,61.04 U1.1 30.94,60.31 v30.7,60.31 | D9.2 33.27,68.02 33.27,65.47 29.82,62.02 v29.51,62.02 29.51,61.62 25.69,57.8 25.69,53.71 22.73,50.75 22.73,49.22 U2.12
  Bottom 0.152: v30.7,60.31 30.7,60.82 v29.51,62.02
GDR
  Top 0.152: J1.2 87.76,13.66 87.76,16.08 86.99,16.84 86.99,18.49 R4.2 87.38,18.49 90.17,21.28 93.09,21.28 96.5,17.87 Q3.1
GND  (via drill 0.35)
  Top 0.152: U2.29_6 U2.29_5 | U4.6 155.19,22.05 U4.9 154.54,21.9 154.54,21.85 154.4,21.71 154.12,21.71 U4.4
  other vias: 57.15,64.21 50.8,73.1 68.58,54.05 62.23,46.43 59.69,33.73 63.5,36.27 72.39,32.46 72.39,15.95 64.77,14.68 54.61,7.06 95.25,4.52 102.87,4.52 93.98,17.22 82.55,18.49 60.96,21.03 38.1,24.84 97.79,8.33 90.17,18.49 87.63,32.46 125.73,1.98 158.75,21.03 157.48,48.97 166.37,45.16 161.29,60.4 144.78,54.05 152.4,51.51 48.26,54.05 68.58,31.19 67.31,40.08 69.85,40.08 63.5,31.19 38.1,64.21 44.45,14.68 39.37,18.49 46.38,10.33 35.56,28.65 30.48,24.84 21.59,24.84 22.86,33.73 11.43,29.92 15.24,13.41 46.99,37.54 40.64,43.89 54.61,51.51 78.74,24.84 21.59,98.5 8.89,103.58 109.22,43.89 99.06,52.78 115.57,59.13 116.84,52.78 143.51,28.65 144.78,46.43 87.63,69.29 83.82,65.48 86.36,64.21 95.25,62.94 78.74,65.48 85.09,59.13 81.28,69.29 83.82,36.27 77.44,34.99 78.74,36.27 86.36,19.76 83.82,19.76 93.98,10.87 93.98,8.33 90.07,13.14 34.46,66.65 31.53,65.94 29.81,67.77 78.73,33.28 76.02,33.06 75.06,31.27 75.28,29.6 66.9,32.81 28.37,108.17 25.86,106.57 23.42,106.6 20.83,106.19 84.2,15.94 8.31,47.33 7.93,50.27 11.24,52.66 54,109.16 62.54,106.74 55.83,106.81 50.3,105.77 9.53,51.87 35.81,61.77 68.55,10.88 85.13,12.81 64.69,33.21 67.2,30.9 79.41,11.49 80.02,12.57 73.38,11.3 142.28,50.15 35.34,65.7
  pour Top: 73.62,10.93 73.64,10.95 92.73,10.95 92.75,10.93 92.77,10.91 92.79,10.89 92.79,0.79 168.88,0.79 170.1,2.01 170.1,64.18 168.88,65.4 92.69,65.4 92.67,65.42 91.38,66.71 91.36,66.73 91.36,111.12 68.61,111.12 67.35,109.87 67.33,109.85 20.3,109.85 20.28,109.87 20.26,109.89 20.24,109.91 20.24,111.12 0.08,111.12 0.08,75.67 7.68,68.06 7.7,68.04 7.7,47.68 7.68,47.66 0.08,40.05 0.08,0.79 73.58,0.79 73.58,10.89 73.6,10.91
  pour Bottom: 73.62,10.93 73.64,10.95 92.73,10.95 92.75,10.93 92.77,10.91 92.79,10.89 92.79,0.79 168.88,0.79 170.1,2.01 170.1,64.18 168.88,65.4 92.69,65.4 92.67,65.42 91.38,66.71 91.36,66.73 91.36,111.12 68.61,111.12 67.35,109.87 67.33,109.85 20.3,109.85 20.28,109.87 20.26,109.89 20.24,109.91 20.24,111.12 0.08,111.12 0.08,75.67 7.68,68.06 7.7,68.04 7.7,47.68 7.68,47.66 0.08,40.05 0.08,0.79 73.58,0.79 73.58,10.89 73.6,10.91
GPIO8  (via drill 0.3)
  Top 0.152: v46.23,50.24 46.23,49.96 53.95,42.24 55.12,42.24 55.5,41.86 56.26,41.86 57.15,42.75 57.15,45.41 56.51,46.05 56.51,55.32 R1.2 | v20.32,47.95 20.19,48.08 20.19,49.1 U2.10
  Bottom 0.152: v20.32,47.95 20.74,47.95 22.74,49.96 45.95,49.96 v46.23,50.24
I2C_PW  (via drill 0.3)
  Top 0.152: 22.73,68.15 22.73,66.62 U2.17 | 97.03,33.1 96.77,32.84 96.77,31.06 97.15,30.68 97.15,26.11 C1.1 | 97.03,33.1 97.79,33.1 R1_PINH.2 | 81.53,34.11 80.77,33.35 79.88,33.35 SENSOR2.6 | 81.53,34.11 82.68,34.11 SENSOR2.2 | 88.9,41.99 87.76,41.99 80.64,34.87 | 80.64,34.87 79.88,34.87 SENSOR2.8 79.76,34.87 v78.61,34.87 | 81.53,34.11 80.77,34.87 80.64,34.87 | 97.03,33.1 89.15,40.97 89.15,41.99 88.9,41.99 | 88.9,41.99 C2.1 | 22.73,68.15 21.81,69.07 21.81,72.12 21.49,72.44 21.49,73.09 20.97,73.61 R2-PINH.2 | 22.73,68.15 24.37,68.15 25.84,69.62 34.49,69.62 v34.67,69.8
  Bottom 0.152: v78.61,34.87 53.24,60.25 44.22,60.25 v34.67,69.8
INT_RTC  (via drill 0.3)
  Top 0.152: v17.65,36.52 17.65,49.1 U2.8 17.65,49.22 17.65,50.77 29.33,62.45 29.64,62.45 v29.99,62.8 | v18.03,6.81 18.41,6.43 18.41,5.79 TP15.TP | v115.32,21.67 116.84,21.67 R1_PINH1.1 | v37.97,68.4 37.95,68.38 37.95,67.68 v32.42,62.15 | v77.38,61.33 77.38,61.09 84.45,54.02 U3.3 84.45,52.53 v113.54,23.45
  Bottom 0.152: v17.65,36.52 17.65,7.19 v18.03,6.81 | v77.38,61.33 45.04,61.33 v37.97,68.4 | v113.54,23.45 v113.54,23.44 v115.32,21.67 | v32.42,62.15 30.64,62.15 v29.99,62.8
IO/BOOT  (via drill 0.3)
  Top 0.152: R_BOOT.2 45.97,109.8 47.12,109.8 47.24,109.68 BOOT_BUTTON.4 47.37,109.55 50.67,109.55 BOOT_BUTTON.3 50.8,109.68 50.93,109.55 50.93,109.42 51.69,108.66 51.69,108.53 51.82,108.41 52.07,108.41 | v25.27,68.02 25.27,66.62 U2.15 | v51.82,107.64 52.45,108.28 52.45,108.41 52.07,108.41 | 52.07,108.41 C6.1
  Bottom 0.152: v51.82,107.64 51.82,101.55 25.27,75.01 v25.27,68.02
IO/CHANGE  (via drill 0.3)
  Top 0.152: C10.1 66.93,108.53 65.79,109.68 CHANGE_BUTTON.3 65.66,109.55 65.15,109.55 65.15,110.06 64.9,110.31 62.99,110.31 62.48,109.8 62.1,109.8 | 62.1,109.8 60.96,109.8 R_CHANGE.2 60.83,109.68 60.71,109.8 60.71,109.93 60.45,110.18 v60.07,110.18 | 62.1,109.8 62.23,109.68 CHANGE_BUTTON.4 62.1,109.8 | v15.07,75.35 15.07,66.62 U2.23
  Bottom 0.152: v60.07,110.18 59.94,110.31 21.08,110.31 15.11,104.34 15.11,75.39 v15.07,75.35
MISO  (via drill 0.3)
  Top 0.152: 11.43,75.01 10.67,75.01 10.03,74.37 10.03,66.62 U2.27 | v7.11,93.67 5.97,93.67 J4.P7 | v13.72,75.77 12.95,75.01 11.43,75.01 | 11.43,75.01 R8.1 | v32.51,59.77 U1.2 | v32.51,72.21 32.51,73.1 D12.1 | TP6.TP 122.55,4.52 122.55,3.89 122.3,3.63 122.3,0.58 122.17,0.46 115.7,0.46 v115.19,0.96
  Bottom 0.152: v32.51,59.77 29.33,59.77 23.97,65.12 23.97,65.23 13.72,75.49 v13.72,75.77 14.76,76.81 14.76,86.02 v7.11,93.67 | 48.84,49.75 48.03,50.57 48.03,50.63 38.89,59.77 v32.51,59.77 | 48.84,49.75 | 48.84,49.75 57.86,40.74 57.86,39.62 64.24,33.24 64.24,33.02 64.5,32.76 64.9,32.76 66.74,30.92 66.74,30.71 69.99,27.47 69.99,27.31 86.27,11.02 92.51,11.02 102.57,0.96 v115.19,0.96 | v32.51,72.21 32.51,62.67 32.85,62.33 32.85,61.97 32.51,61.63 v32.51,59.77
MOSI  (via drill 0.3)
  Top 0.152: TP7.TP 117.47,4.52 117.47,3.89 114.05,0.46 93.34,0.46 92.58,1.22 92.58,10.12 92.31,10.39 82.14,10.39 81.8,10.73 J1.14 81.79,13.6 81.79,15.95 v81.87,16.03 | D11.2 22.86,85.55 v19.94,85.55 | v15.62,86.56 15.49,86.69 10.16,86.69 | 10.16,86.69 7.49,89.36 5.97,89.36 J4.P3 | 42.29,55.07 40.13,57.23 39.62,57.23 | 42.29,55.07 42.54,54.81 42.54,51.51 R7.1 | 39.62,57.23 U1.5 39.5,57.23 | v17.02,50.75 16.38,50.11 16.38,49.22 U2.7 | 39.62,57.23 v38.99,56.59 | 42.29,55.07 42.42,55.07 v43.31,55.96 | v77.89,22.13 77.85,22.09 v77.85,21.15 | v7.73,72.48 7.75,72.5 7.75,74.76 10.16,77.17 10.16,86.69
  Bottom 0.152: v19.94,85.55 16.64,85.55 v15.62,86.56 | v38.99,56.59 32.98,50.59 17.18,50.59 v17.02,50.75 12.46,50.75 10.01,50.75 8.25,52.51 8.25,57.99 7.75,58.49 7.75,65.99 6.83,66.9 6.83,67.27 7.73,68.17 v7.73,72.48 | v77.89,22.13 77.85,22.17 76.58,22.17 64.68,34.08 64.55,34.08 58.14,40.49 58.14,40.85 49.12,49.87 49.12,49.88 48.31,50.69 48.31,50.74 43.31,55.74 v43.31,55.96 | v81.87,16.03 77.85,20.05 v77.85,21.15
N$1
  Top 0.152: R2-USB1.2 153.03,46.43 153.03,47.19 153.42,47.57 165.35,47.57 165.73,47.95 165.73,51.76 164.46,53.03 163.7,53.03 J2.A5
N$2
  Top 0.152: R2-USB2.1 151.13,48.34 151.51,48.34 161.29,58.11 164.6,58.11 165.28,57.44 165.28,56.94 164.42,56.08 163.7,56.08 J2.B5
N$4  (via drill 0.3)
  Top 0.152: 24.26,89.99 25.15,89.99 IC4.3 | Q1.2 26.29,27.76 26.29,28.4 26.16,28.52 25.4,28.52 25.15,28.78 24.76,28.78 7.37,46.18 2.54,46.18 0.38,48.34 0.38,69.54 2.89,72.05 7.9,72.05 8.16,72.31 8.16,74.78 23.37,89.99 24.26,89.99 | 24.26,89.99 24.26,91.52 24.51,91.77 25.15,91.77 IC4.1 25.27,91.77 v26.67,91.77 | v48.51,98.88 48.51,99.77 | v83.18,71.45 83.18,70.56 C1_BAT1.1 | v57.02,97.61 56.77,97.87 54.86,97.87 51.56,101.17 49.15,101.17 48.51,100.53 48.51,99.77 | 48.51,99.77 D2.1
  Bottom 0.152: v48.51,98.88 48.51,98.87 41.42,91.77 v26.67,91.77 | v57.02,97.61 v83.18,71.45
N$5
  Top 0.152: 77.85,43.26 76.33,43.26 75.69,43.89 D3.2 | 77.85,43.26 80.01,43.26 C4.1 | D4.1 77.85,38.81 77.85,43.26
N$6
  Top 0.152: R2_BAT.2 122.55,57.86 122.55,49.61 122.3,49.35 122.3,47.83 MCP73831.5
N$7
  Top 0.152: R1_BAT.2 163.19,31.19 163.19,30.43 161.16,28.4 155.83,28.4 153.42,30.81 153.42,31.06 139.34,45.13 125.5,45.13 124.46,46.18 122.55,46.18 122.3,45.92 122.3,45.16 MCP73831.1
N$8
  Top 0.152: R1_BAT.1 161.92,31.21 161.92,33.13 165.57,36.78 167.63,36.78 CHG_LED.C
N$9  (via drill 0.3)
  Top 0.152: v73.15,13.66 76.71,13.66 J1.24 | EPD_C12.1 23.49,18.49 23.49,5.99 24.9,4.59 27.14,4.59 35.94,13.38 41.39,13.38 46.84,18.83 67.63,18.83 67.66,18.86 67.67,18.86 v67.82,19.01
  Bottom 0.152: v73.15,13.66 72.9,13.66 67.82,18.74 v67.82,19.01
N$10
  Top 0.152: IC1.5 69.98,98.25 69.98,101.68 69.85,101.68 C_DELAY.1
N$11  (via drill 0.3)
  Top 0.152: v33.65,17.6 33.65,18.49 EPD_C10.1 | J1.22 77.85,13.54 77.85,10.74 77.47,10.36 73.79,10.36 63.88,0.46 55.12,0.46 v54.4,1.18
  Bottom 0.152: v54.4,1.18 54.32,1.18 54.1,0.96 51.05,0.96 34.42,17.6 v33.65,17.6
N$12  (via drill 0.3)
  Top 0.152: v67.94,27.76 67.94,28.65 EPD_C6.1 | J1.18 79.76,13.66 79.76,13.92 80.01,14.17 80.01,14.89 77.21,17.7 v77.21,17.71
  Bottom 0.152: 77.2,17.71 77.2,19.53 69.71,27.01 69.71,27.22 69.17,27.76 v67.94,27.76 | 77.2,17.71 | 77.2,17.71 v77.21,17.71
N$13  (via drill 0.3)
  Top 0.152: 60.32,27.89 60.32,28.65 EPD_C7.2 | 69.21,27.89 69.21,28.65 EPD_C6.2 | 69.21,27.89 68.58,27.25 60.45,27.25 60.32,27.38 60.32,27.89 | 24.64,19.38 24.76,19.25 24.76,18.49 EPD_C12.2 | EPD_C11.2 14.6,18.49 15.49,19.38 24.64,19.38 | 34.92,19.51 34.92,18.49 EPD_C10.2 | 34.92,19.51 42.54,27.13 42.54,27.63 | 42.54,27.63 42.54,28.65 EPD_C9.2 | 34.92,19.51 34.92,19.89 34.67,20.14 25.61,20.14 25.52,20.06 v25.52,20.04 | 42.54,27.63 51.18,27.63 51.43,27.89 51.43,28.65 EPD_C8.2 52.32,28.65 53.35,27.62 60.06,27.62 60.32,27.89 | EPD_C5.2 75.5,18.57 75.5,19.46 v75.58,19.53 | v69.21,27.12 v69.21,27.13 69.21,27.89 | v24.76,19.38 24.64,19.38
  Bottom 0.152: v75.58,19.53 75.48,19.63 75.48,20.84 v69.21,27.12 | v25.52,20.04 25.43,20.04 v24.76,19.38 | v24.76,19.38
N$14  (via drill 0.3)
  Top 0.152: J1.19 79.25,13.66 79.25,14.79 v76.32,17.72 | EPD_C7.1 59.05,28.65 59.71,29.3 64.63,29.3 65.79,28.14 v66.12,28.14
  Bottom 0.152: v66.12,28.14 66.12,27.93 76.32,17.74 v76.32,17.72
N$15  (via drill 0.3)
  Top 0.152: v78.74,12.65 78.74,13.54 J1.20 | EPD_C8.1 50.16,28.65 50.82,29.3 52.07,29.3 53.26,28.11 v58.07,28.11
  Bottom 0.152: v78.74,12.65 73.52,12.65 67.54,18.63 67.54,18.64 v58.07,28.11
N$16
  Top 0.152: R_CAPACITOR.1 109.25,20.35 111.17,20.35 112.01,19.51 118.49,19.51 119,20.01 120.65,20.01 D7.1
N$17
  Top 0.152: EPD_C2.1 76.83,28.65 76.83,27.89 77.1,27.62 81.55,27.62 84.56,24.61 84.56,17.49 86.3,15.74 J1.5
N$18
  Top 0.152: J1.4 86.74,13.66 86.74,15.7 84.84,17.6 84.84,26.11 85.72,27 85.72,28.65 EPD_C1.1
PREVGH  (via drill 0.3)
  Top 0.305: v78.36,15.06 78.36,13.66 J1.21 | v85.34,34.24 85.72,34.62 85.72,35 D5.1 | v79.91,16.61 79.87,16.64 79.87,18.53 79.86,18.54 79.86,22.27 79.88,22.29 v79.88,22.43 | EPD_C9.1 42.4,29.79 70.41,29.79 v77.26,22.94
  Bottom 0.305: v85.34,34.24 85.34,33.98 80.06,28.7 80.06,22.78 79.88,22.6 v79.88,22.43 79.49,22.04 79,22.04 78.1,22.94 v77.26,22.94 | v79.91,16.61 v78.36,15.06
PREVGL  (via drill 0.3)
  Top 0.305: v77.34,15.06 77.34,13.66 J1.23 | v82.17,38.05 82.17,38.81 D4.2 | EPD_C11.1 13.33,18.49 13.33,19.25 14.04,19.96 v24.33,19.96 | v25.53,20.78 32.13,20.78 41.57,30.22 70.4,30.22 v70.61,30.43 | v79.36,17.12 79.36,22.31 79.21,22.46 v79.21,22.54
  Bottom 0.305: 79.63,28.9 82.17,31.44 v82.17,38.05 | v25.53,20.78 24.76,20.01 24.38,20.01 v24.33,19.96 | v70.61,30.43 78.1,30.43 79.63,28.9 | v79.36,17.12 79.36,17.08 v77.34,15.06 | 79.63,28.9 79.63,28.75 79.53,28.65 79.53,22.85 v79.21,22.54
RESE
  Top 0.152: 92.71,19.13 92.46,19.13 92.46,16.71 88.39,12.65 87.38,12.65 87.25,12.78 87.25,13.54 J1.3 | 92.71,19.13 R3.2 | 92.71,19.13 94.35,19.13 96.91,16.56 99.68,16.56 99.69,16.57 Q3.2
RESE'  (via drill 0.3)
  Top 0.152: 92.71,20.4 93.47,20.4 97.03,16.84 99.57,16.84 99.95,17.22 101.22,17.22 101.6,16.84 R2.2 | 92.71,20.4 v91.19,20.4 | 92.71,20.4 R3.1 | v76.12,21.79 72.91,18.58 67.78,18.58 67.75,18.55 47.41,18.55 41.15,12.29 SJ1.2
  Bottom 0.152: v91.19,20.4 90,21.58 76.33,21.58 v76.12,21.79
RESET
  Top 0.152: R_RESET.2 20.95,109.8 22.1,109.8 22.22,109.68 RESET_BUTTON.4 22.35,109.55 22.86,109.55 22.86,110.06 23.11,110.31 26.16,110.31 | 27.05,108.41 26.8,108.41 26.67,108.53 26.67,108.68 26.53,108.81 26.52,108.81 25.91,109.42 | 25.91,109.42 25.91,109.55 25.78,109.68 RESET_BUTTON.3 25.91,109.42 | 26.16,110.31 26.03,110.18 26.03,109.55 25.91,109.42 | U2.3 11.3,49.22 11.3,50.96 9.18,53.08 9.18,55.92 8.06,57.04 8.06,71.81 8.45,72.21 8.45,74.68 22.88,89.1 26.03,89.1 27.94,91.01 28.45,91.01 29.21,91.77 29.21,99.49 27.05,101.65 27.05,108.41 | 27.05,108.41 C5.1 | IC1.1 54.96,98.18 45.09,108.05 45.06,108.05 42.8,110.31 26.16,110.31
RTC_RST  (via drill 0.3)
  Top 0.152: U3.4 85.72,54.43 85.22,54.93 84.14,54.93 v81.19,57.89 | U2.16 24,66.62 24,67.39 25.95,69.34 35.29,69.34 35.5,69.54 v35.56,69.54
  Bottom 0.152: v35.56,69.54 35.8,69.54 44.8,60.54 78.46,60.54 81.1,57.89 v81.19,57.89
RX  (via drill 0.3)
  Top 0.152: v17.02,65.1 16.76,64.85 14.6,64.85 13.84,65.61 13.84,66.5 U2.24 | v49.4,50.24 v47.75,50.24 | v77.47,30.94 80.5,27.9 83.2,27.9 84.96,29.67 89.92,29.67 v101.09,18.49 | TP2.TP 141.86,4.52 138.94,1.6 v130.05,1.6
  Bottom 0.152: v17.02,65.1 17.53,65.61 22.07,65.61 30.31,57.36 40.9,57.36 47.75,50.51 v47.75,50.24 | v49.4,50.24 49.4,49.99 60.72,38.67 68.57,38.67 69.6,37.64 69.62,37.64 72.77,34.49 73.91,34.49 v77.47,30.94 | v130.05,1.6 129.67,1.6 115.51,15.75 103.83,15.75 v101.09,18.49
SCK  (via drill 0.3)
  Top 0.152: 109.85,6.04 102.11,6.04 96.46,11.69 87.31,11.69 86.35,10.74 82.64,10.74 82.3,11.08 v82.3,12.78 82.3,13.54 J1.13 | 109.85,6.04 111.38,4.52 TP8.TP | 109.85,6.04 112.52,8.71 112.52,12.14 D10.2 | 44.7,51.13 43.81,50.23 42.55,50.23 38.48,54.3 | 38.48,54.3 38.48,58.24 38.73,58.5 U1.6 | v15.11,50.24 15.11,49.22 U2.6 | 38.48,54.3 v38.35,54.18 | J4.P5 5.84,91.52 5.42,91.52 4.33,90.42 4.33,87.78 4.83,87.28 v4.83,76.4 | v7.45,51.76 7.31,51.9 7.31,66.99 7.26,67.04 v7.26,67.09 | R6.1 44.7,56.19 44.7,51.13 | 44.7,51.13 45.95,49.88 45.95,49.83 57.1,38.68 v58.04,38.68
  Bottom 0.152: v4.83,76.4 8.25,72.97 8.25,68.11 7.26,67.11 v7.26,67.09 | v7.45,51.76 7.45,51.6 9.31,49.73 14.6,49.73 v15.11,50.24 22.63,50.24 22.65,50.26 34.45,50.26 38.35,54.16 v38.35,54.18 | v58.04,38.68 58.16,38.68 64.37,32.48 64.78,32.48 66.46,30.8 66.46,30.6 66.8,30.26 66.8,27.69 76.13,18.36 76.28,18.36 76.78,17.87 76.78,14.99 77.22,14.55 78.68,14.55 80.45,12.78 v82.3,12.78
SCL  (via drill 0.3)
  Top 0.152: R2-PINH.1 19.68,76.91 19.68,74.5 21.21,72.97 v21.21,72.08 20.95,71.83 19.68,71.83 18.92,71.07 18.92,66.62 U2.20 | 156.84,22.55 155.96,22.55 U4.7 | J3.4 164.34,20.78 162.8,20.78 161.02,22.55 156.84,22.55 | v81.66,32.59 82.68,32.59 SENSOR2.4 | U3.16 v81.91,61.04 88.52,61.04 88.9,61.42 88.9,63.45 91.57,66.12 99.44,66.12 143.17,22.39 150.38,22.39 151.54,21.23 153.49,21.23 153.51,21.21 156.65,21.21 156.84,21.41 156.84,22.55
  Bottom 0.152: v81.91,61.04 81.66,60.78 | v21.21,72.08 21.21,71.45 25.15,67.51 27.18,67.51 32.38,72.72 33.02,72.72 44.92,60.82 78.57,60.82 78.61,60.78 81.66,60.78 | 81.66,60.78 v81.66,32.59
SDA  (via drill 0.3)
  Top 0.152: v82.55,63.7 83.18,63.07 U3.15 | U2.19 20.19,66.5 20.19,66.34 21.77,64.76 28.35,64.76 32.61,69.02 35.37,69.02 35.46,69.11 v37.28,69.11 | 165.35,19.76 165.61,20.01 165.61,21.16 165.1,21.67 162.31,21.67 160.91,23.06 155.96,23.06 U4.8 | 165.35,19.76 164.46,19.76 J3.3 | 98.04,25.73 98.04,31.44 98.17,31.57 98.17,31.83 97.79,31.83 R1_PINH.1 | 88.26,35.89 89.92,35.89 90.42,35.38 90.42,30.19 95.16,25.46 97.77,25.46 98.04,25.73 | 165.35,19.76 165.61,19.51 165.61,0.58 165.43,0.4 129.21,0.4 110.11,19.51 104.27,19.51 98.04,25.73 | 88.26,35.89 v88.14,36.02 | 88.26,35.89 87.66,35.28 87.64,35.28 85.71,33.35 82.76,33.35 SENSOR2.3
  Bottom 0.152: v88.14,36.02 82.55,41.6 v82.55,63.7 79.6,66.65 79.49,66.65 77.19,68.94 62.45,68.94 62.29,69.11 v37.28,69.11
SRC
  Top 0.152: 69.72,41.22 66.67,38.18 66.67,36.27 L1.1 | C4.2 80.01,44.53 73.02,44.53 69.72,41.22 | Q3.3 101.85,17.22 101.6,17.47 101.6,18.62 89.78,30.44 89.78,34.6 D5.2 87.76,35 84.49,31.74 79.25,31.74 71.38,39.6 71.35,39.6 69.72,41.22
SS_SD  (via drill 0.3)
  Top 0.152: D8.2 R10.1 120.65,33.1 v112.39,33.1 | U2.4 12.57,49.22 v12.57,50.24 12.57,50.49 v13.33,51.26 | J4.P2 6.22,88.21 5.23,88.21 v4.95,87.94 | v61.21,38.18 60.97,38.18 60.95,38.15 57.24,38.15 45.67,49.72 45.67,49.75 45.47,49.95 42.44,49.95 41.39,51 27.32,51 v27.28,51.04 | v72.9,33.98 75.81,33.98 78.9,30.9 84.11,30.9 v84.84,30.17
  Bottom 0.152: v13.33,51.26 17.14,51.26 17.36,51.04 v27.28,51.04 | v12.57,50.24 12.34,50.47 9.33,50.47 7.86,51.94 7.86,57.43 6.55,58.74 6.55,72.69 2.92,76.32 2.92,77.67 6.75,81.5 6.75,86.13 v4.95,87.94 | v72.9,33.98 72.67,34.21 72.65,34.21 69.5,37.36 69.49,37.36 68.67,38.18 v61.21,38.18 | v84.84,30.17 85.56,30.9 109.96,30.9 112.16,33.1 v112.39,33.1
TX  (via drill 0.3)
  Top 0.152: v12.57,65.48 12.57,66.5 U2.25 | v47.12,50.24 47.12,49.48 51.05,45.54 v54.48,45.54 | v74.55,37.92 79.25,37.92 85.47,44.14 90.36,44.14 111.92,22.59 115.41,22.59 v115.82,22.17 | TP1.TP 146.94,4.52 137.03,14.43 v123.57,14.43
  Bottom 0.152: v12.57,65.48 16,65.48 26.16,55.32 37.08,55.32 38.85,57.09 40.27,57.09 v47.12,50.24 | v123.57,14.43 v115.82,22.17 | v54.48,45.54 61.07,38.95 68.69,38.95 69.72,37.92 v74.55,37.92
USB_D+  (via drill 0.3)
  Top 0.152: v129.41,51.13 130.81,51.13 D1.1 | U2.14 25.27,49.1 25.27,48.08 v25.36,47.99 | v84.84,31.44 84.6,31.44 84.58,31.46 79.13,31.46 71.27,39.32 69.21,39.32 68.2,38.3 68.2,32.96 65.82,30.58 42.79,30.58 v27.19,46.18 | v25.36,47.99
  Bottom 0.152: v84.84,31.44 85.08,31.44 85.09,31.46 109.73,31.46 127.9,49.63 127.91,49.63 v129.41,51.13 | v25.36,47.99 27.18,46.18 v27.19,46.18
USB_D-  (via drill 0.3)
  Top 0.152: v128.27,49.35 130.81,49.35 D1.3 | v71.75,34.49 v71.76,34.49 75.7,34.49 79.01,31.18 84.47,31.18 v84.84,30.81 | v24.13,47.95 24,48.08 24,49.1 U2.13 | v28.32,45.67 43.1,30.89 61.1,30.89 v64.72,34.51
  Bottom 0.152: v128.27,49.35 128.02,49.35 109.84,31.18 85.2,31.18 v84.84,30.81 | v28.32,45.67 26.42,45.67 v24.13,47.95 | v64.72,34.51 64.75,34.49 v71.75,34.49
VBAT  (via drill 0.3)
  Top 0.127: 153.92,22.17 U4.3
  Top 0.305: 153.92,22.43 153.92,22.17 | 153.92,22.43 U4.2 | 152.4,29.29 152.78,29.29 152.78,29.03 152.65,28.9 152.65,23.19 v153.16,22.68 153.43,22.68 153.48,22.64 153.72,22.64 153.92,22.43 | 152.4,29.29 150.75,29.29 135.25,44.78 124.08,44.78 124.08,45.03 MCP73831.3 | 152.4,29.29 C2_BAT.1 | v137.41,3.5 137.79,3.89 137.79,4.52 TP3.TP | v26.03,29.03 25.4,29.67 Q1.3
  Bottom 0.305: v26.03,29.03 26.03,0.58 26.16,0.46 73.02,0.46 73.18,0.61 73.18,9.96 73.9,10.67 92.36,10.67 92.82,10.21 92.82,6.2 98.56,0.46 134.37,0.46 v137.41,3.5 153.16,19.25 v153.16,22.68
VBUS  (via drill 0.3)
  Top 0.127: 26.05,57.15 39.66,70.77
  Top 0.305: 161.4,33.11 166.6,38.3 167.64,38.3 CHG_LED.A | C1_BAT.1 156.21,29.29 157.61,29.29 161.42,33.1 161.4,33.11 | 124.08,48.08 124.08,47.83 MCP73831.4 124.08,48.08 | 124.08,48.08 131.06,48.08 131.95,48.97 131.95,49.73 132.46,50.24 D1.5 141.62,50.24 142.06,50.68 145.86,50.68 148.21,48.34 149.86,48.34 C5_USB.1 149.86,46.68 151.64,44.91 151.76,44.91 | 151.76,44.91 151.76,45.16 C4_USB.1 151.76,44.91 | 151.76,44.91 151.76,44.4 152.02,44.14 153.29,44.14 153.42,44.02 153.42,42.62 | 161.4,33.11 153.42,41.1 153.42,42.62 | 153.42,42.62 PFMF.050.1.2 | 24.51,26.75 24.51,27.63 Q1.1 | TP14.TP 25.4,7.06 25.65,7.31 25.65,19.2 25.02,19.84 25.02,19.98 24.51,20.49 24.51,26.75 | 21.84,43.76 27.3,38.3 27.3,27.25 26.8,26.75 24.51,26.75 | 21.84,43.76 19.81,45.8 19.05,45.8 R1_PWRUSB.2 | v124.08,49.22 124.08,48.08 | 50.42,81.48 v50.29,81.61 | 50.42,81.48 50.46,81.52 50.46,99.65 D2.2 | 50.42,81.48 39.97,71.03 39.86,71.03 39.66,70.83 39.66,70.77 | 21.84,43.76 26.05,47.97 26.05,57.15
  Bottom 0.305: v124.08,49.22 106.55,66.75 91.82,66.75 91.57,67 79.64,67 77.34,69.3 62.6,69.3 v50.29,81.61
VRTC  (via drill 0.3)
  Top 0.305: 110.24,21.67 109.22,21.67 R_CAPACITOR.2 | C8.1 113.03,20.4 111.63,20.4 111.31,20.71 111.19,20.71 110.24,21.67 | 123.82,42.49 132.08,42.49 C10_SUPERCAP.2 | U3.14 84.45,63.7 86.11,65.35 90.3,65.35 91.42,66.47 99.59,66.47 123.57,42.49 123.82,42.49 | 123.82,42.49 v123.82,42.37 | 110.24,21.67 110.24,23.66 v110.09,23.81
  Bottom 0.305: v123.82,42.37 110.24,28.78 110.24,23.95 v110.09,23.81
VUSB  (via drill 0.3)
  Top 0.305: 163.45,52.02 163.54,51.93 | 163.54,51.93 163.58,51.89 163.58,51.76 J2.A4 | 163.54,51.93 163.6,52 J2.B9 163.45,52.02 | 163.45,52.02 162.81,52.02 161.92,52.91 | 161.92,52.91 161.92,55.7 162.81,56.59 163.58,56.59 | 163.58,56.59 J2.B4 | 161.92,52.91 157.73,52.91 v152.27,47.45 | v149.61,44.78 148.84,44.02 148.84,42.62 PFMF.050.1.1 | J2.A9 163.58,56.82 163.58,56.59
  Bottom 0.305: v149.61,44.78 v152.27,47.45